# Altium PCB PCB.PcbDoc (part 1 of 3)
Units mm, origin at the board's own origin, x right, y up, seen from the top; angles counter-clockwise.
Board outline 152.4 x 101.6 mm, 2 copper layers (Top Layer, Bottom Layer); 124 components, 87 nets, 375 pads, 305 vias.
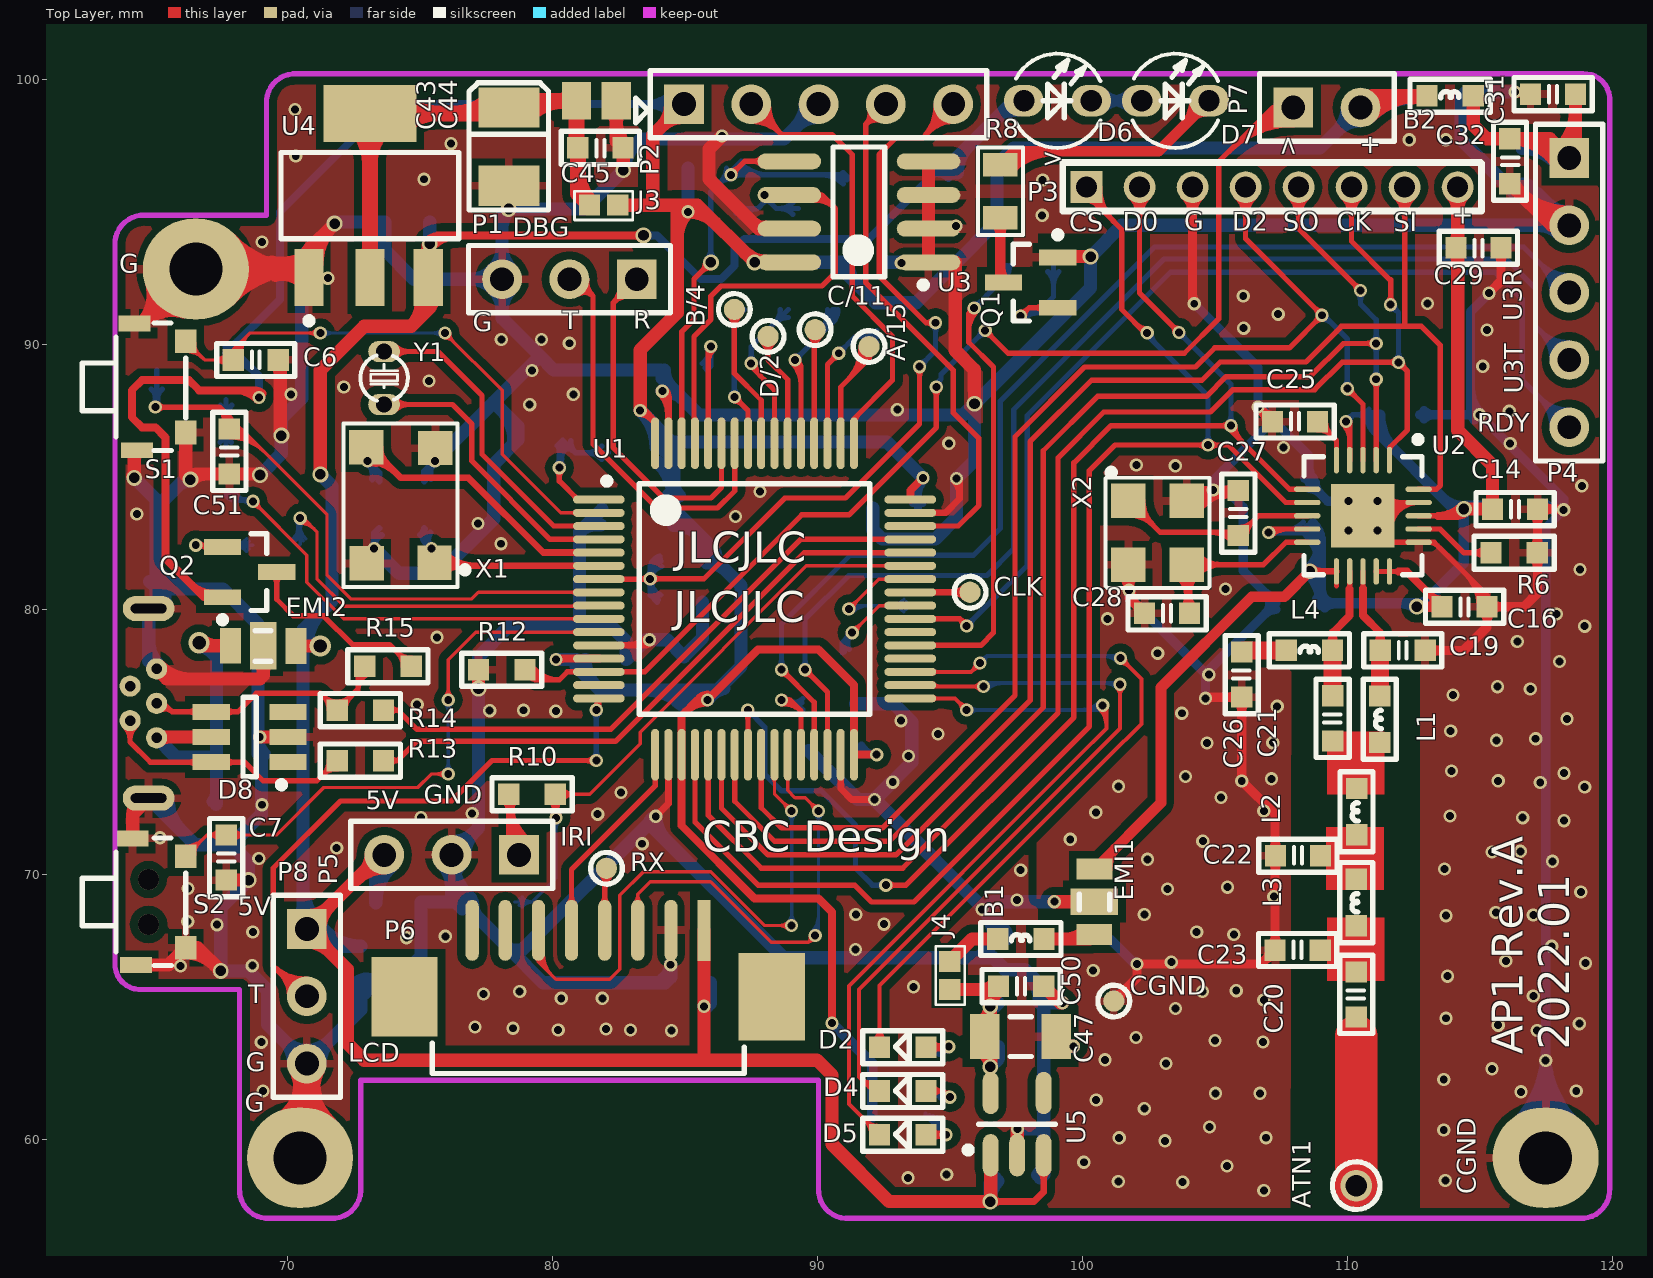
[diagram p0: Top Layer view]
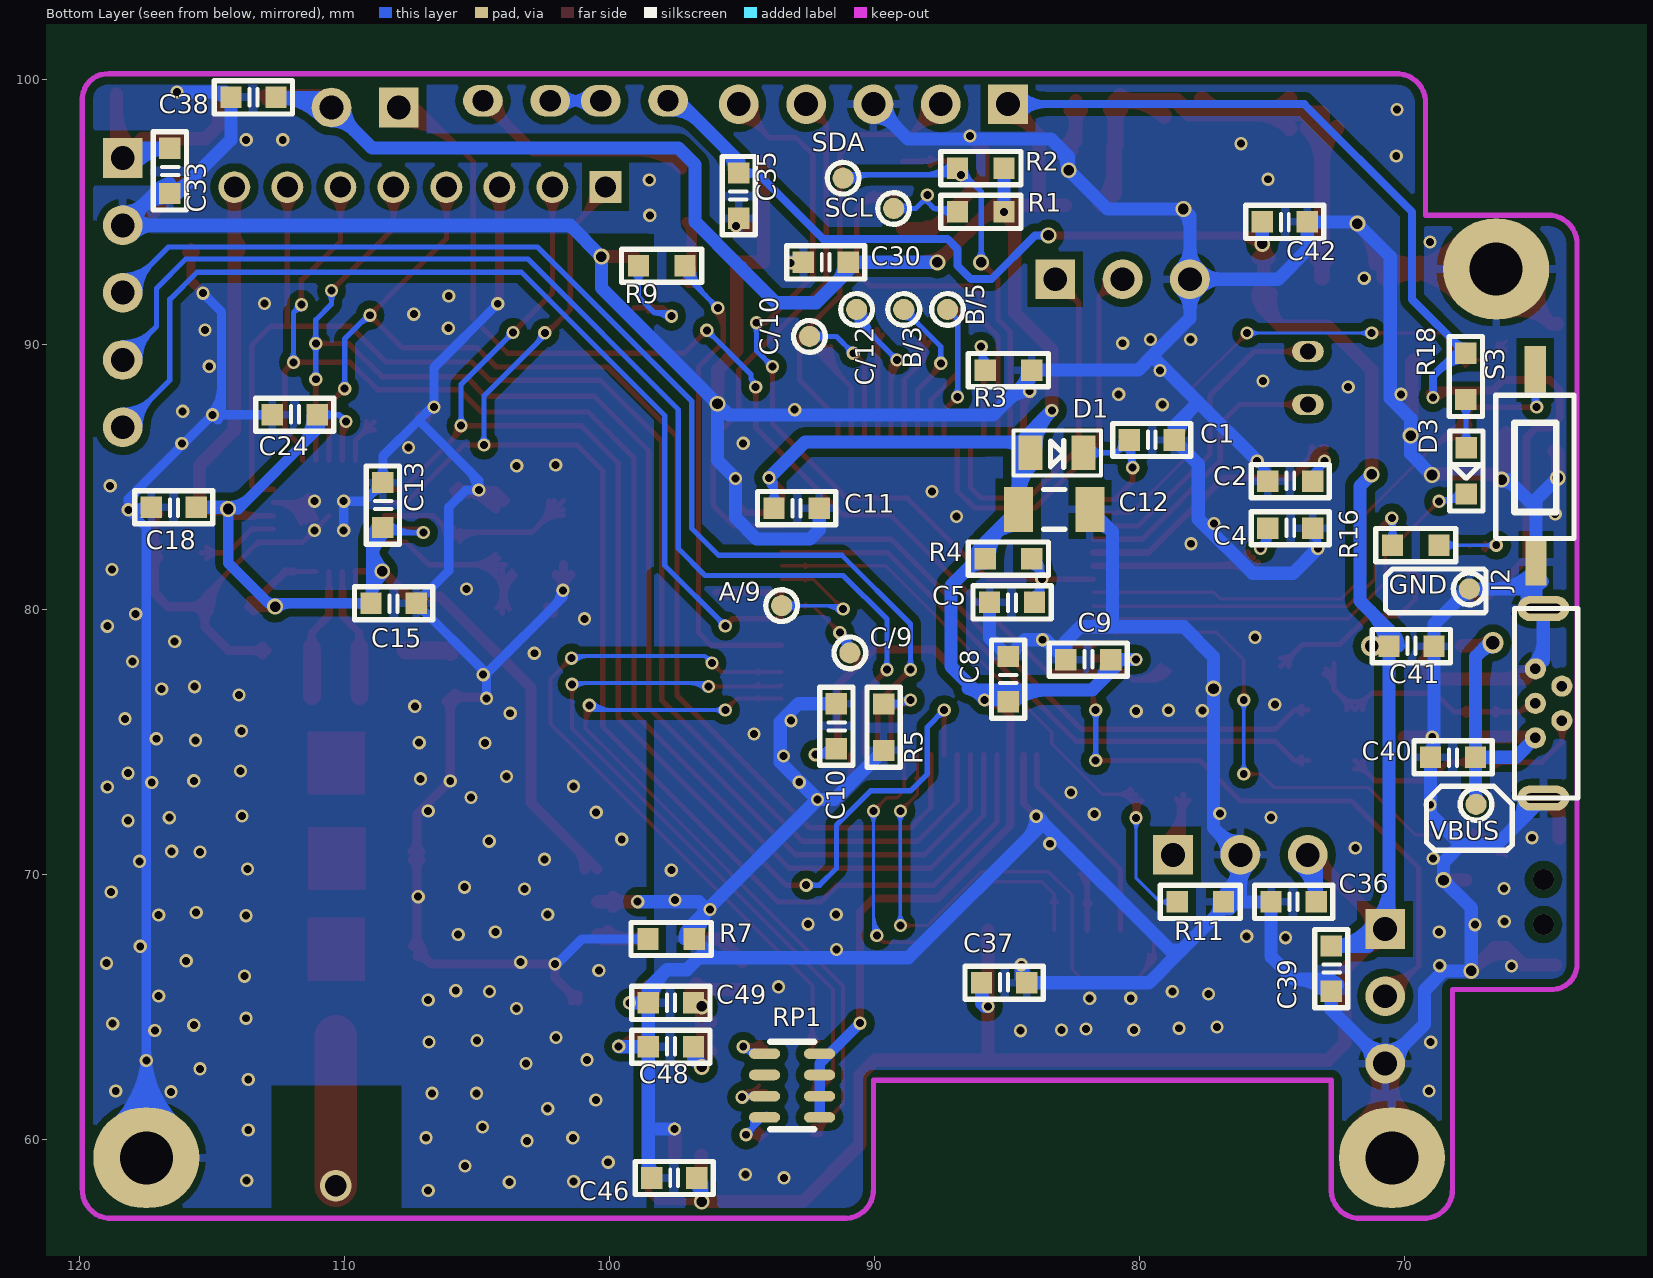
[diagram p1: Bottom Layer view, seen from below]

## Layer stack, top to bottom
Top Solder: solder mask 0.0102, Solder Resist, Dk 3.5
Top Layer: signal copper 0.0356
Dielectric 1: dielectric 0.32, FR-4, Dk 4.8
Bottom Layer: signal copper 0.0356
Bottom Solder: solder mask 0.0102, Solder Resist, Dk 3.5

## Board outline
25.4,25.4 177.8,25.4 177.8,127 25.4,127

## Design rules (kind name [scope] priority, off if disabled: settings)
Clearance Clearance_1 [IsRegion] p1: gap=0.3
Clearance [All] p2: gap=0.15
ComponentClearance [All] p1: gap=0.127 collisioncheckmode=3 verticalgap=0.254 showdistances=FALSE
DiffPairsRouting [All] p1: maxlimit=2 minlimit=0.2 mostfreqgap=0.254 toplayer_minwidth=0.2 toplayer_maxwidth=2 toplayer_prefwidth=0.381 bottomlayer_minwidth=0.2 bottomlayer_maxwidth=2 bottomlayer_prefwidth=0.381 maxuncoupledlength=12.7
HoleSize [All] p1: absolutevalues=TRUE maxlimit=6.3 minlimit=0.2 maxpercent=80.000 minpercent=20.000
HoleToHoleClearance [All] p1: gap=0.15 allowstackedmicrovias=TRUE
MinimumSolderMaskSliver [All] p1: minsoldermaskwidth=0.15
PlaneClearance [All] p1: clearance=0.4
PlaneConnect [All] p1: planeconnectstyle=Relief reliefexpansion=0.508 reliefentries=4 reliefconductorwidth=0.4 reliefairgap=0.254
PolygonConnect PolygonConnect_1 [IsVia] p1: connectstyle=Direct reliefconductorwidth=0.254 reliefentries=4 polygonreliefangle="90 Angle" airgapwidth=0.254
PolygonConnect [All] p2: connectstyle=Relief reliefconductorwidth=0.3 reliefentries=4 polygonreliefangle="90 Angle" airgapwidth=0.254
RoutingVias [All] p1: holewidth=0.3 width=0.5 viastyle="Through Hole" minholewidth=0.3 minwidth=0.5 maxholewidth=1 maxwidth=2
SilkToSilkClearance [All] p1: silktosilkclearance=0.089
SilkToSolderMaskClearance [IsPad] p1: minsilkscreentomaskgap=0.127 clearancetoexposedcopper=TRUE
SolderMaskExpansion [All] p1: expansion=0.102
Width [All] p1: maxlimit=5 minlimit=0.127 preferedwidth=0.2
20 further rules are at their usual default settings.

## Classes and differential pairs
component class Sheet4: C40 C41 C42 C43 C44 C45 C46 C47 C48 C49 C50 D8 EMI2 GND J2 J3 J4 Q2 R13 R14 R15 R16 U4 U5 VBUS
component class Sheet3: B2 C30 C31 C32 C33 C35 C36 C37 C38 C39 D6 D7 P4 P5 P6 P7 P8 Q1 R8 R9 R10 R11 R12 RX SCL SDA U3
component class Sheet2: ATN1 B1 C13 C14 C15 C16 C18 C19 C20 C21 C22 C23 C24 C25 C26 C27 C28 C29 CGND EMI1 L1 L2 L3 L4 P3 R6 R7 U2 X2
component class Sheet1: A/9 A/15 B/4 B/5 C1 C2 C4 C5 C6 C7 C8 C9 C10 C11 C12 C51 C/9 C/11 CLK D1 D2 D3 D4 D5 D/2 P1 P2 R1 R2 R3 R4 R5 R18 RP1 S1 S2 S3 TP3 TP5 TP7 U1 X1 Y1
differential pair USB_FS_D: +USB_FS_D_P -USB_FS_D_N
differential pair D: +D_P -D_N
differential pair RFO: +RFO_P -RFO_N

## Components (designator, comment, footprint, x,y, rotation, side; value= is the part's Value field where it differs from the comment)
A/9 "TestPoint" TP_0.8 93.505,80.141 r90 bottom (schematic designator TP10)
A/15 "TestPoint" TP_0.8 91.948,89.916 r90 top (schematic designator TP8)
ATN1 "TestPoint" TP 110.327,58.257 r90 top
B1 "680R" L0603 98.552,67.564 r180 top
B2 "680R" L0603 114.746,99.374 r180 top
B/3 "TestPoint" TP_0.8 88.9,91.313 r90 bottom (schematic designator TP3)
B/4 "TestPoint" TP_0.8 86.868,91.313 r90 top (schematic designator TP2)
B/5 "TestPoint" TP_0.8 87.249,91.313 r90 bottom (schematic designator TP1)
C1 "0.1uf" C0603 79.394,86.39 r180 bottom
C2 "10pf" C0603 74.168,84.836 r180 bottom
C4 "10pf" C0603 74.168,83.058 r180 bottom
C5 "0.1uf" C0603 84.963,80.264 r0 bottom
C6 "0.1uf" C0603 68.961,89.408 r0 top
C7 "0.1uf" C0603 67.691,70.485 r270 top
C8 "0.1uf" C0603 84.963,77.216 r270 bottom
C9 "0.1uf" C0603 81.788,78.105 r180 bottom
C10 "0.1uf" C0603 91.44,75.438 r270 bottom
C11 "0.1uf" C0603 93.091,83.82 r0 bottom
C12 "10uf" C1206 83.227,83.774 r0 bottom
C13 "0.01uf" C0603 108.549,83.784 r270 bottom
C14 "0.01uf" C0603 116.169,83.784 r180 top
C15 "220pf" C0603 108.295,80.228 r0 bottom
C16 "220pf" C0603 114.264,80.101 r180 top
C18 "220pF NP0" C0603 116.589,83.852 r0 bottom
C19 "3.9pF NP0" C0603 112.232,78.45 r0 top
C20 "220pF NP0" C0603 110.327,65.623 r90 top
C21 "3.9pF NP0" C0603 109.438,76.037 r90 top
C22 "8.2pF NP0" C0603 108.281,70.703 r0 top
C23 "5.6pF NP0" C0603 108.268,67.147 r0 top
C24 "0.1uf" C0603 111.724,87.34 r180 bottom
C25 "0.1uf" C0603 108.168,87.086 r0 top
C26 "220pF NP0" C0603 106.009,77.688 r90 top
C27 "12pF NP0" C0603 105.882,83.784 r90 top
C28 "15pF NP0" C0603 103.342,79.847 r0 top
C29 "0.1uf" C0603 114.788,93.64 r180 top
C30 "0.1uf" C0603 91.694,93.091 r180 bottom
C31 "0.1uf" C0603 117.602,99.441 r180 top
C32 "0.01uf" C0603 116.128,96.756 r270 top
C33 "1uf" C0603 116.586,96.393 r270 bottom
C35 "1uf" C0603 95.123,95.758 r90 bottom
C36 "0.1uf" C0603 74.041,68.961 r180 bottom
C37 "0.1uf" C0603 84.963,65.913 r180 bottom
C38 "0.1uf" C0603 113.284,99.314 r180 bottom
C39 "0.1uf" C0603 72.771,66.294 r270 bottom
C40 "0.1uf" C0603 68.326,74.422 r0 bottom
C41 "1uf" C0603 69.596,78.613 r180 bottom
C42 "0.1uf" C0603 74.676,94.615 r0 bottom
C43 "25V" C_B型 78.359,98.933 r270 top
C44 "4.7uf" C0805 81.661,99.187 r180 top
C45 "0.1uf" C0603 81.661,97.409 r180 top
C46 "0.1uf" C0603 97.409,58.547 r180 bottom
C47 "22uf" C1206 97.663,63.881 r180 top
C48 "4.7uf" C0603 97.536,63.5 r180 bottom
C49 "0.1uf" C0603 97.536,65.151 r180 bottom
C50 "220pf" C0603 97.536,65.786 r180 top
C51 "0.1uf" C0603 67.818,86.106 r90 top
C/9 "TestPoint" TP_0.8 90.932,78.359 r90 bottom (schematic designator TP9)
C/10 "TestPoint" TP_0.8 92.456,90.297 r90 bottom (schematic designator TP7)
C/11 "TestPoint" TP_0.8 89.916,90.551 r90 top (schematic designator TP6)
C/12 "TestPoint" TP_0.8 90.678,91.313 r90 bottom (schematic designator TP5)
CGND "TestPoint" TP_0.8 101.181,65.223 r90 top (schematic designator TP15)
CLK "TestPoint" TP_0.8 95.758,80.645 r90 top (schematic designator TP11)
D1 "1N4148" D0805 83.144,85.855 r180 bottom
D2 "红色LED" LED0603 93.218,63.5 r180 top
D3 "黄色LED" LED0603 67.691,85.217 r270 bottom
D4 "红色LED" LED0603 93.218,61.849 r180 top
D5 "红色LED" LED0603 93.218,60.198 r180 top
D6 "LED-R" LED_S 97.79,99.187 r0 top
D7 "LED-R" LED_S 102.235,99.187 r0 top
D8 "TVS" USBLC6-2 68.58,75.184 r180 top
D/2 "TestPoint" TP_0.8 88.138,90.297 r90 top (schematic designator TP4)
EMI1 "NFM21PC105B1C" NFM21PC 100.457,68.961 r270 top
EMI2 "NFM21PC105B1C" NFM21PC 69.088,78.613 r180 top
GND "TestPoint" TP_0.8 67.564,80.772 r90 bottom (schematic designator TP20)
J2 "USBmini" USB_MICRO_B 64.77,76.454 r90 bottom
J3 "JUMPER" Jsmall 81.407,95.25 r0 top
J4 "JUMPER" Jsmall 94.996,65.659 r90 top
L1 "27nH" L0603 111.216,76.73 r270 top
L2 "22nH" L0603 110.339,73.243 r270 top
L3 "27nH" L0603 110.327,69.814 r270 top
L4 "27nH" L0603 109.438,78.45 r180 top
P1 "DEBUG UART" HDR1X3 83.185,92.456 r180 top
P2 "Header 5" HDR1X5 84.963,99.06 r0 top
P3 "Header 8" CC1101 100.153,95.928 r90 top
P4 "CO2" HDR1X5 118.364,97.028 r270 top
P5 "Header 3" HDR1X3 78.74,70.739 r180 top
P6 "PM25" 1.25T-8P 85.725,67.691 r180 top
P7 "LIGHT" HDR1X2 107.95,98.933 r0 top
P8 "LCD" HDR1X3 70.739,67.945 r270 top
Q1 "NPN" SOT23_BJT 98.044,92.329 r180 top
Q2 "PNP" SOT23_BJT 68.58,81.407 r0 top
R1 "4K7" R0603 86.868,94.996 r180 bottom
R2 "4K7" R0603 86.868,96.647 r180 bottom
R3 "0R" R0603 84.074,89.027 r0 bottom
R4 "10K" R0603 84.074,81.915 r0 bottom
R5 "10K" R0603 89.662,74.676 r90 bottom
R6 "56K" R0603 115.407,82.133 r0 top
R7 "0R" R0603 98.552,67.564 r180 bottom
R8 "4R3" R0805 96.901,96.774 r90 top
R9 "100R" R0603 97.155,92.964 r0 bottom
R10 "1K" R0603 78.359,73.025 r0 top
R11 "DNE" R0603 76.835,68.961 r0 bottom
R12 "10K" R0603 77.216,77.724 r0 top
R13 "20R" R0603 71.882,74.295 r0 top
R14 "20R" R0603 71.882,76.2 r0 top
R15 "1K" R0603 74.676,77.851 r180 top
R16 "100R" R0603 68.707,82.423 r0 bottom
R18 "1K" R0603 67.691,89.662 r270 bottom
RP1 "1K" R_PACK4_SMD 92.075,60.833 r90 bottom
RX "TestPoint" TP_0.8 82.042,70.231 r90 top (schematic designator TP18)
S1 "SW-PB" SWPB_SMD_90D_48_18_15#1 64.77,88.392 r90 top
S2 "SW-PB" SWPB_SMD_90D_48_18_15#2 64.77,68.961 r90 top
S3 "SW-PB" SW2*1Small 63.246,85.217 r90 bottom
SCL "TestPoint" TP_0.8 89.281,95.123 r90 bottom (schematic designator TP16)
SDA "TestPoint" TP_0.8 91.186,96.266 r90 bottom (schematic designator TP17)
U1 "STM32F103RB" STM32F103RB 87.63,80.391 r0 top
U2 "CC1101" QFN50P400X400X80_HS-21N 110.581,83.53 r270 top
U3 "AT24C512" AT24C02 91.567,94.996 r180 top
U4 "AMS1117-3.3V" SOT223 72.517,96.012 r0 top
U5 "ADP151" ADP151 97.536,60.579 r90 top
VBUS "TestPoint" TP_0.8 67.31,72.644 r90 bottom (schematic designator TP19)
X1 "XTAL-8Mhz" XTAL5032 74.295,83.947 r90 top
X2 "XTAL4" XTAL3225 102.834,82.895 r270 top
Y1 "XTAL-32K768Hz" CRY_S 73.152,89.027 r90 top

## Footprints (in the part's own frame and the unit in brackets; to place one, negate y for a bottom-side part, rotate by r counter-clockwise, add the part's x,y. Pads: shape width x height; smd on the part's side, far side on the other; paste and mask are expansions set on the pad)
1.25T-8P [mm]
  rect 0.5x2.3 smd: 1(0,-0.2)
  oval 0.5x2.3 smd: 2(1.25,-0.2) 3(2.5,-0.2) 4(3.75,-0.2) 5(5,-0.2) 6(6.25,-0.2) 7(7.5,-0.2) 8(8.75,-0.2)
  rect 2.5x3.3 smd: ""(-2.55,2.3)
  rect 2.5x3 smd: ""(11.3,2.3)
  silkscreen extent -1.51,4.06 10.26,5.2
ADP151 [mm]
  oval 1.6x0.6 smd: 1(-1.175,1) 2(-1.175,0) 3(-1.175,-1) 4(1.175,-1) 5(1.175,1)
  silkscreen extent -1.1,-1.45 0,1.97, body extent -0.8,-1.45 0.8,1.45, height 1
AT24C02 [mm] "SOIC, 8-Leads, Body 4.9x3.9mm (max), Pitch 1.27mm, IPC Medium Density"
  oval 2.4x0.6 smd: 1(-2.625,1.905) 2(-2.625,0.635) 3(-2.625,-0.635) 4(-2.625,-1.905) 5(2.625,-1.905) 6(2.625,-0.635) 7(2.625,0.635) 8(2.625,1.905)
  silkscreen extent -2.55,-2.45 0.98,2.88, body extent -1.95,-2.45 1.95,2.45, height 2.65
C0603 [mm]
  rect 0.8x0.813 smd: 1(-1,0) 2(0.7,0)
  silkscreen extent -1.63,-0.63 1.32,0.63
C0805 [mm] "Chip Capacitor, Body 2.0x1.3mm, IPC High Density"
  rect 1.1x1.4 smd: 1(-0.75,0) 2(0.75,0)
  body extent -1.1,-0.72 1.1,0.72, height 1.4
C1206 [mm] "Chip Capacitor, Body 3.2x1.6mm, IPC High Density"
  rect 1.1x1.7 smd: 1(-1.35,0) 2(1.35,0)
  silkscreen extent -0.4,-0.75 0.4,0.75, body extent -1.7,-0.9 1.7,0.9, height 1.3
C_B型 [mm]
  rect 1.524x2.3 smd: 1(0,0) 2(2.95,0)
  silkscreen extent -0.93,-1.5 3.87,1.5
CC1101 [mm]
  rect 1.2x1.2 hole 0.8: 1(0,0)
  round 1.2 hole 0.8: 2(0,-2) 3(0,-4) 4(0,-6) 5(0,-8) 6(0,-10) 7(0,-12) 8(0,-14)
  silkscreen extent -0.9,-14.9 0.93,0.9
CRY_S [mm]
  oval 0.8x1.2 hole 0.6: 1(-1.3,-0.5) 2(0.7,-0.5)
  silkscreen extent -1.16,-1.4 0.56,0.4
D0805 [mm]
  rect 0.9x1.3 smd: 1(-0.97,0.05) 2(1.03,0.05)
  silkscreen extent -1.62,-0.8 1.68,0.9
HDR1X2 [mm] "Connector; Header; 2 Position"
  rect 1.5x1.5 hole 0.9: 1(0,0)
  round 1.5 hole 0.9: 2(2.54,0)
  silkscreen extent -1.27,-1.27 3.81,1.27
HDR1X3 [mm] "Connector; Header; 3 Position"
  rect 1.5x1.5 hole 0.9: 1(0,0)
  round 1.5 hole 0.9: 2(2.54,0) 3(5.08,0)
  silkscreen extent -1.27,-1.27 6.35,1.27
HDR1X5 [mm] "Connector; Header; 5 Position"
  rect 1.5x1.5 hole 0.9: 1(0,0)
  round 1.5 hole 0.9: 2(2.54,0) 3(5.08,0) 4(7.62,0) 5(10.16,0)
  silkscreen extent -1.27,-1.27 11.43,1.27
Jsmall [mm]
  rect 0.8x0.8 smd: 1(0,0) 2(1.06,0)
  silkscreen extent -0.57,-0.56 1.63,0.53
L0603 [mm]
  rect 0.8x0.813 smd: 1(0,0) 2(1.75,0)
  silkscreen extent -0.64,-0.63 2.39,0.63
LED0603 [mm]
  rect 0.8x0.813 smd: 1(-0.88,0.02) 2(0.87,0.02)
  silkscreen extent -1.51,-0.61 1.51,0.64
LED_S [mm]
  oval 1.5x1.2 hole 0.8: 1(0,0) 2(2.54,0)
  silkscreen extent -0.34,-1.78 2.88,1.78
NFM21PC [mm] "Chip Inductor, 2-Leads, Body 2.0x1.3mm, IPC Medium Density"
  rect 0.8x1.35 smd: 1(-1.24,0) 3(1.23,-0.01)
  rect 1x1.8 smd: 2(-0.01,-0.01)
  silkscreen extent -0.3,-0.58 0.3,0.58, body extent -1,-0.63 1,0.63, height 0.85
QFN50P400X400X80_HS-21N [mm] "QFN, 20-Leads, Body 4.00x4.00mm, Pitch 0.50mm, Thermal Pad 2.40x2.40mm, IPC Medium Density"
  oval 1x0.2 smd: 1(-2.1,1) 2(-2.1,0.5) 3(-2.1,0) 4(-2.1,-0.5) 5(-2.1,-1) 11(2.1,-1) 12(2.1,-0.5) 13(2.1,0) 14(2.1,0.5) 15(2.1,1)
  oval 0.2x1 smd: 6(-1,-2.1) 7(-0.5,-2.1) 8(0,-2.1) 9(0.5,-2.1) 10(1,-2.1) 16(1,2.1) 17(0.5,2.1) 18(0,2.1) 19(-0.5,2.1) 20(-1,2.1)
  rect 2.4x2.4 smd: 21(0,0)
  silkscreen extent -3,-2.23 2.23,2.22, body extent -2.07,-2.08 2.08,2.07, height 0.8
R0603 [mm]
  rect 0.8x0.813 smd: 1(0,0) 2(1.75,0)
  silkscreen extent -0.64,-0.63 2.39,0.63
R0805 [mm]
  rect 0.9x1.3 smd: 1(-2,0) 2(0,0)
  silkscreen extent -2.65,-0.85 0.65,0.85
R_PACK4_SMD [mm]
  oval 0.4x1.174 smd: 1(0,0) 2(0,2.074) 3(0.8,0) 4(0.8,2.074) 5(1.6,0) 6(1.6,2.074) 7(2.4,0) 8(2.4,2.074)
  silkscreen extent -0.45,0.21 2.85,1.86
SOT23_BJT [mm]
  rect 1.4x0.6 smd: 1(-1.025,-0.95) 2(-1.025,0.95) 3(1.025,0)
  silkscreen extent -1.15,-1.92 0.65,1.45, body extent -0.65,-1.46 0.65,1.47, height 1.45
SOT223 [mm]
  rect 1.1x2.15 smd: 1(-1.7,-3.5) 2(0.6,-3.5) 3(2.8,-3.5)
  rect 3.5x2.15 smd: 2(0.6,2.7)
  silkscreen extent -2.75,-5.25 3.95,1.22
STM32F103RB [mm] "SQFP, 64-Leads, Body 12.0x12.0mm (max), Pitch 0.50mm, IPC Medium Density"
  oval 1.95x0.3 smd: 1(-5.875,3.75) 2(-5.875,3.25) 3(-5.875,2.75) 4(-5.875,2.25) 5(-5.875,1.75) 6(-5.875,1.25) 7(-5.875,0.75) 8(-5.875,0.25) 9(-5.875,-0.25) 10(-5.875,-0.75) 11(-5.875,-1.25) 12(-5.875,-1.75) 13(-5.875,-2.25) 14(-5.875,-2.75) 15(-5.875,-3.25) 16(-5.875,-3.75) 33(5.875,-3.75) 34(5.875,-3.25) 35(5.875,-2.75) 36(5.875,-2.25) 37(5.875,-1.75) 38(5.875,-1.25) 39(5.875,-0.75) 40(5.875,-0.25) 41(5.875,0.25) 42(5.875,0.75) 43(5.875,1.25) 44(5.875,1.75) 45(5.875,2.25) 46(5.875,2.75) 47(5.875,3.25) 48(5.875,3.75)
  oval 0.3x1.95 smd: 17(-3.75,-5.875) 18(-3.25,-5.875) 19(-2.75,-5.875) 20(-2.25,-5.875) 21(-1.75,-5.875) 22(-1.25,-5.875) 23(-0.75,-5.875) 24(-0.25,-5.875) 25(0.25,-5.875) 26(0.75,-5.875) 27(1.25,-5.875) 28(1.75,-5.875) 29(2.25,-5.875) 30(2.75,-5.875) 31(3.25,-5.875) 32(3.75,-5.875) 49(3.75,5.875) 50(3.25,5.875) 51(2.75,5.875) 52(2.25,5.875) 53(1.75,5.875) 54(1.25,5.875) 55(0.75,5.875) 56(0.25,5.875) 57(-0.25,5.875) 58(-0.75,5.875) 59(-1.25,5.875) 60(-1.75,5.875) 61(-2.25,5.875) 62(-2.75,5.875) 63(-3.25,5.875) 64(-3.75,5.875)
  silkscreen extent -5.7,-4.35 4.35,4.57, body extent -5,-5 5,5, height 2.45
SW2*1Small [mm]
  rect 1.8x0.8 smd: 1(-3.42,1.802) 2(3.81,1.83)
  silkscreen extent -2.54,0.37 2.86,3.32
SWPB_SMD_90D_48_18_15#1 [mm]
  rect 0.9x0.8 smd: 1(-1.725,-1.4) 2(1.725,-1.4)
  rect 0.6x1.2 smd: ""(-2.388,0.441) ""(2.387,0.53)
  silkscreen extent -2.4,-1.4 2.41,2.5
SWPB_SMD_90D_48_18_15#2 [mm]
  rect 0.9x0.8 smd: 1(-1.725,-1.4) 2(1.725,-1.4)
  rect 0.6x1.2 smd: ""(-2.375,0.48) ""(2.4,0.6)
  silkscreen extent -2.4,-1.4 2.41,2.5
TP [mm] "测试点"
  round 1.2 hole 0.8: 1(0,0)
  silkscreen extent -0.9,-0.9 0.9,0.9
TP_0.8 [mm]
  round 0.8 smd paste+0: 1(0,0)
  silkscreen extent -0.6,-0.6 0.6,0.6
USB_MICRO_B [mm]
  round 0.8 hole 0.4: 1(-1.3,0.3) 2(-0.65,-0.7) 3(0,0.3) 4(0.65,-0.7) 5(1.3,0.3)
  oval 0.95x1.95 hole 0.35 slot 1.35 at 90 deg: 5(-3.575,0) 5(3.575,0)
  silkscreen extent -3.57,-1.3 3.58,1.09
USBLC6-2 [mm] "SOT23, 6-Leads, Body 3.0x3.0mm (max), Pitch 0.95mm, IPC Medium Density"
  rect 1.4x0.6 smd: 1(-1.45,0.95) 2(-1.45,0) 3(-1.45,-0.95) 4(1.45,-0.95) 5(1.45,0) 6(1.45,0.95)
  silkscreen extent -1.33,-1.5 0.25,1.92, body extent -0.87,-1.52 0.87,1.53, height 1.45
XTAL3225 [mm]
  rect 1.3x1.3 smd: 1(-1.21,-1.1) 2(1.21,-1.1) 3(1.21,1.1) 4(-1.21,1.1)
  silkscreen extent -2.4,-1.96 2.09,1.96, body extent -1.71,-1.25 1.6,1.36, height 0.7
XTAL5032 [mm]
  rect 1.3x1.3 smd: 1(-2.19,-1.26) 2(2.14,-1.28) 3(2.17,1.32) 4(-2.21,1.3)
  silkscreen extent -3.11,-2.54 3.07,2.17, body extent -2.5,-1.59 2.49,1.6, height 0.7

## Part data
A/9 A/15 ATN1 B/3 B/4 B/5 C/9 C/10 C/11 C/12 CGND CLK D/2 GND RX SCL SDA VBUS: "一个测试点"
B1 B2 L2: library part L
C1 C2 C4 C5 C6 C7 C8 C9 C10 C11 C12 C13 C14 C15 C16 C18 C19 C20 C21 C22 C23 C24 C25 C26 C27 C28 C29 C30 C31 C32 C33 C35 C36 C37 C38 C39 C40 C41 C42 C44 C45 C46 C47 C48 C49 C50 C51: library part Cap, "Capacitor"
C43: library part Cap+, "Polarized Capacitor (Radial)"
D1: library part DIODE, "Diode"
D2 D3 D4 D5 D6 D7: library part LED, "Typical INFRARED GaAs LED"
D8: library part USBLC6-2
J2: library part USB_mini
J3 J4: library part J
L1 L3 L4: library part L, "LQG15HS27NJ02D"
P1 P8: library part "Header 3", "Header, 3-Pin"
P2: "Header, 5-Pin"
P3: "Header, 8-Pin"
P4: library part "Header 5", "Header, 5-Pin"
P5: "Header, 3-Pin"
P6: library part "Header 8", "Header, 8-Pin"
P7: library part "Header 2", "Header, 2-Pin"
Q1: "NPN Bipolar Transistor"
Q2: "PNP Bipolar Transistor"
R1 R2 R3 R4 R5 R6 R7 R8 R9 R10 R11 R12 R13 R14 R15 R16 R18: library part Res
RP1: library part RESPACK4
S1 S2 S3: "Switch"
U3: "2-wire Serial  EEPROM  512K (65,536 x 8)"
U4: library part 1117
X1: library part XTALSMT
Y1: library part XTAL, "Crystal Oscillator 32K"

## Free pads (board coordinates)
  oval 4x3.8 hole 2: 0(66.548,92.837) 1(70.485,59.309) 2(117.475,59.309)

## Via types
v1: diameter 0.5, hole 0.3, Top Layer to Bottom Layer, 278 vias
v2: diameter 0.6, hole 0.4, Top Layer to Bottom Layer, 23 vias
v3: diameter 0.8, hole 0.5, Top Layer to Bottom Layer, 2 vias
v4: diameter 0.8, hole 0.8, Top Layer to Bottom Layer, 2 vias

## Nets (pads, with @x,y where several pads share a name; then routed paths per layer and width w, separated by ;. In a path a pad name is that pad's centre, name@x,y a point inside that pad or via, vN(x,y) a via of type N, cw(c..) or ccw(c..) an arc to the next point about the centre after c; other vN are vias at no path point)
3V3: B2.2 C8.2 C9.2 C10.2 C11.2 C12.2 C30.2 C38.2 D1.1 J3.2 P2.1 P7.2 Q2.1 R1.2 R2.2 R4.2 R18.1 RP1.1 RP1.3 RP1.5 RP1.7 U1.13 U1.19 U1.32 U1.48 U1.64 U3.8 | length 207.3
  Top Layer w0.3: 66.4,80.92 ccw(c67.155,81.674) Q2.1@67.155,80.607 ; Q2.1@67.555,80.457 66.863,80.457 65.405,81.915 65.405,86.487 65.024,86.868 64.516,86.868 64.135,87.249 64.135,88.265 64.516,88.646 66.294,88.646 66.675,88.265 68.662,88.265 v1(68.933,87.994) ; 68.037,88.265 cw(c68.037,87.097) v1@68.863,87.923 ; 68.761,88.265 cw(c68.761,87.821) v1@69.075,88.135 ; v1(80.137,78.105) 80.173,78.141 U1.13@81.755,78.141 ; v1@80.208,78.034 cw(c80.465,77.777) 80.465,78.141 ; v1@83.312,87.403 cw(c83.312,86.855) 83.7,87.242 ; v1(83.312,87.503) 83.439,87.503 83.88,87.062 U1.64@83.88,86.266 ; 85.031,76.141 cw(c85.852,75.32) v1@85.852,76.481 ; 85.543,76.653 cw(c85.852,76.344) v1@85.852,76.781 ; v1(90.551,64.389) 90.551,68.58 90.043,69.088 87.63,69.088 84.88,71.838 U1.19@84.88,74.516 84.88,75.99 85.471,76.581 v1(85.852,76.581) 87.757,78.486 90.043,78.486 91.38,77.149 U1.32@91.38,74.516 v1(92.235,74.516) ; U1.48@93.505,84.141 93.505,84.488 v1(93.98,84.963)
  Top Layer w0.5: J3.2@82.804,95.25 83.79,95.25 ; v1(83.312,87.503) 83.312,89.789 84.709,91.186 84.709,95.25 ; P2.1@84.463,99.06 cw(c83.256,99.06) 84.109,98.206 cw(c84.963,97.353) P2.1@84.963,98.56 ; 84.505,95.25 cw(c84.505,94.383) v1(85.118,94.996) ; 84.709,94.009 cw(c86.105,94.009) v1(85.118,94.996) ; P2.1@84.963,99.06 83.79,97.887 83.79,95.25 ; 86.154,94.567 ccw(c85.118,93.531) v1(85.118,94.996) ; 87.253,93.468 ccw(c88.042,94.256) U3.8@88.042,93.141 ; 87.378,93.384 cw(c87.114,92.988) v2@87.581,93.081 ; v2(87.63,93.091) 85.471,95.25 ; P7.2@110.844,98.579 cw(c112.762,96.661) B2.2@112.762,99.374 ; 111.554,99.374 ccw(c111.554,97.869) P7.2@110.49,98.933 110.931,99.374 B2.2@112.996,99.374 ; 112.473,99.297 cw(c112.626,98.726) B2.2@112.921,99.238 ; 83.79,95.25 84.709,95.25 ; 84.709,95.25 cw(c84.709,94.794) v1(85.118,94.996) ; 84.709,95.25 cw(c84.709,94.794) v1(85.118,94.996) ; 84.709,95.25 85.471,95.25 ; v1(85.118,94.996) cw(c85.471,94.878) 85.471,95.25
  Bottom Layer w0.3: R18.1@67.697,89.412 cw(c67.697,87.904) 68.764,88.97 ; R18.1@67.697,89.712 cw(c67.697,88.929) 68.251,89.483 ; R18.1@67.697,89.912 ccw(c67.697,90.5) 68.113,90.084 ; R18.1@67.947,89.662 cw(c68.567,89.662) 68.129,90.1 ; v1(68.933,87.994) 68.933,88.801 68.072,89.662 R18.1@67.691,89.662 69.723,91.694 69.723,94.996 73.787,99.06 P2.1@84.963,99.06 ; C9.2@80.899,78.105 C9.2@81.088,78.105 ; P2.1@84.539,98.636 ccw(c83.514,97.611) 83.514,99.06 ccw(c83.514,100.509) P2.1@84.539,99.484 ; C10.2@91.44,74.738 91.662,74.516 v1(92.235,74.516) cw(c92.235,75.161) C10.2@91.667,74.856 ; C11.2@93.614,84.003 ccw(c93.187,84.43) 93.791,84.43 ccw(c94.395,84.43) C11.2@93.968,84.003 ; C11.2@93.791,83.82 93.791,84.774 v1(93.98,84.963) ; 93.791,84.265 cw(c94.678,84.265) v1@94.051,84.892 ; 94.968,92.964 95.123,92.964
  Bottom Layer w0.4: v1(85.852,76.581) 86.233,76.962 ; v1(90.551,64.389) 92.075,62.865 RP1.5@92.075,62.433 RP1.3@92.075,61.633 RP1.1@92.075,60.833
  Bottom Layer w0.5: v1(80.137,78.105) 80.899,78.105 80.899,77.851 81.788,76.962 86.233,76.962 ; C9.2@81.238,78.099 ccw(c82.654,78.099) 81.653,77.097 ; v1(83.312,87.503) D1.1@84.502,86.313 ; v1@83.35,87.465 cw(c81.99,86.105) D1.1@83.914,86.105 ; 83.518,76.962 cw(c83.518,75.077) C8.2@84.85,76.41 ; D1.1@83.972,85.563 cw(c82.512,84.104) C12.2@84.577,84.104 ; 84.204,86.611 cw(c83.697,86.105) D1.1@84.414,86.105 ; D1.1@84.255,85.963 cw(c85.099,85.119) 85.099,86.313 ; D1.1@84.326,85.917 cw(c83.719,85.311) 84.577,85.311 ; C12.2@84.365,84.286 ccw(c83.853,84.798) 84.577,84.798 ccw(c85.301,84.798) C12.2@84.789,84.286 ; C12.2@84.577,83.174 cw(c84.577,81.725) 85.601,82.75 ; C8.2@84.699,76.739 cw(c85.173,76.348) 85.173,76.962 ; 84.725,76.962 cw(c84.725,76.284) C8.2@85.204,76.763 ; 84.932,76.962 cw(c84.932,75.661) v1(85.852,76.581) ; C8.2@85.085,76.421 cw(c86.233,75.475) 86.233,76.962 ; v1(85.118,94.996) R2.2@85.118,96.647 ; 85.14,83.211 cw(c83.851,81.922) R4.2@85.674,81.922 ; C8.2@85.157,76.476 cw(c85.6,75.9) v1(85.852,76.581) ; R4.2@85.824,81.759 cw(c85.824,80.7) 86.573,81.448 ; 85.852,86.313 D1.1@84.502,86.313 ; 85.854,86.313 92.63,86.313 v1(93.98,84.963) ; 85.994,82.357 cw(c85.558,81.921) R4.2@86.174,81.921 ; 86.476,77.015 ccw(c86.688,76.045) v1(85.852,76.581) ; v2(87.63,93.091) C30.2@90.994,93.091 ; C30.2@90.994,92.775 92.202,91.567 93.726,91.567 95.123,92.964 96.774,94.615 96.774,96.774 97.409,97.409 108.966,97.409 P7.2@110.49,98.933 ; C30.2@91.144,93.085 ccw(c92.253,93.085) 91.469,92.3 ; P7.2@109.99,98.933 cw(c108.783,98.933) 109.636,98.079 cw(c110.49,97.226) P7.2@110.49,98.433 ; P7.2@110.847,98.583 cw(c112.584,96.885) C38.2@112.584,99.314 110.871,99.314 P7.2@110.49,98.933 ; 111.396,99.314 ccw(c111.396,98.047) P7.2@110.49,98.933 ; D1.1@84.502,86.313 84.577,86.238 C12.2@84.577,83.774 85.824,82.527 R4.2@85.824,81.915 86.106,81.915 87.122,80.899 87.122,77.851 86.233,76.962
3V3_RF: B1.2 J4.2 | length 2.2
  Top Layer w0.5: J4.2@94.996,66.719 95.841,67.564 B1.2@96.802,67.564
3V3_RFF: C13.2 C14.2 C15.2 C16.2 C18.1 C24.2 C29.2 EMI1.1 P3.8 U2.4 U2.9 U2.11 U2.14 U2.15 U2.18 | length 85.6
  Top Layer w0.2: v1(107.025,82.895) 107.152,82.895 v1@107.224,82.967 ; v1@107.131,82.789 cw(c107.713,82.207) 107.713,83.03 ; v1@107.16,83.03 U2.9@108.481,83.03 ; U2.11@109.574,81.43 U2.11@109.581,81.43 109.581,80.879 ; v1@109.84,86.98 cw(c109.258,86.398) 110.081,86.398 ; U2.4@110.081,85.63 v1@110.081,87.078 ; U2.14@111.081,81.43 U2.15@111.581,81.43 111.919,81.43 ; U2.18@112.681,83.53 113.409,83.53
  Top Layer w0.254: v2(108.576,81.438) 109.566,81.438 U2.11@109.574,81.43 ; v2@108.698,81.316 cw(c108.994,81.02) 108.994,81.438 cw(c108.994,81.856) v2@108.698,81.56
  Top Layer w0.3: 111.919,81.43 112.235,81.43 C16.2@113.564,80.101 ; 113.127,80.539 ccw(c113.564,80.977) C16.2@113.564,80.358 ; 113.142,80.523 cw(c112.727,80.108) C16.2@113.314,80.108 ; 113.409,83.53 114.137,83.53 ; 113.416,83.53 ccw(c113.416,84.759) v2@114.285,83.89 ; 114.14,83.53 ccw(c114.14,84.035) v2@114.497,83.678 ; v2@114.241,83.783 cw(c113.886,83.781) 114.137,83.53 ; v2@114.391,83.634 ccw(c114.388,83.279) 114.137,83.53 ; v2(114.391,83.784) 114.137,83.53
  Top Layer w0.4: EMI1.1@100.457,70.201 102.961,72.705 102.961,77.053 106.39,80.482 107.62,80.482 v2(108.576,81.438) ; EMI1.1@100.932,70.201 cw(c102.079,70.201) 101.268,71.012 ; v2(112.613,80.101) C16.2@113.564,80.101 ; C16.2@113.423,79.96 ccw(c113.082,79.618) 113.082,80.101 ccw(c113.082,80.584) C16.2@113.423,80.242
  Top Layer w0.5: P3.8@113.906,95.681 cw(c113.308,95.083) 114.153,95.083 cw(c114.998,95.083) P3.8@114.401,95.681 ; C29.2@113.982,93.528 cw(c113.568,93.114) 114.153,93.114 ; C29.2@113.982,93.753 ccw(c113.568,94.167) 114.153,94.167 ; P3.8@114.153,95.928 114.153,86.751 115.469,85.435 C14.2@115.469,83.784 v2(114.391,83.784)
  Bottom Layer w0.2: v1(107.025,82.895) 108.36,82.895 C13.2@108.549,83.084 ; v1@107.131,82.789 cw(c107.388,82.533) 107.388,82.895 cw(c107.388,83.257) v1@107.131,83.001 ; 107.362,82.895 ccw(c107.362,84.265) C13.2@108.331,83.296 ; 107.845,82.895 ccw(c107.845,83.782) C13.2@108.472,83.155 ; v1(109.946,87.086) 110.2,87.34 ; v1@109.947,87.236 ccw(c109.949,87.591) 110.2,87.34 ; v1@110.096,87.087 cw(c110.451,87.089) 110.2,87.34 ; C24.2@110.812,87.128 ccw(c110.3,86.616) 110.3,87.34 ccw(c110.3,88.064) C24.2@110.812,87.552 ; C24.2@111.024,87.34 110.2,87.34
  Bottom Layer w0.4: C13.2@108.414,82.943 cw(c107.012,81.54) 108.995,81.54 ; v2@108.505,81.367 cw(c107.322,80.184) C15.2@108.995,80.184 ; v2@108.507,81.511 ccw(c107.45,82.638) 108.995,82.638 ; C13.2@108.549,83.084 108.995,82.638 ; C13.2@108.556,82.884 cw(c108.556,82.417) C13.2@108.886,82.747 ; C13.2@108.697,83.225 cw(c107.978,82.506) 108.995,82.506 ; C13.2@108.756,83.084 ccw(c109.254,83.084) C13.2@108.902,82.731 ; 108.781,81.219 ccw(c108.317,81.714) 108.995,81.714 ; v2@108.788,81.65 cw(c108.287,81.149) 108.995,81.149 ; C15.2@108.854,80.376 ccw(c108.513,80.717) 108.995,80.717 ccw(c109.478,80.717) C15.2@109.137,80.376 ; C15.2@109.137,80.087 cw(c109.478,79.745) 109.478,80.228 cw(c109.478,80.711) C15.2@109.137,80.369 ; C24.2@110.824,87.334 ccw(c111.702,87.334) 111.081,86.713 ; C24.2@110.883,87.192 cw(c110.542,86.851) 111.024,86.851 cw(c111.507,86.851) C24.2@111.166,87.192 ; C24.2@111.024,87.34 111.024,86.77 114.01,83.784 v2(114.391,83.784) 114.391,81.752 112.867,80.228 C15.2@108.995,80.228 108.995,82.638 ; C24.2@111.224,87.334 ccw(c113.068,87.334) 111.764,86.03 ; 112.065,80.228 cw(c112.065,79.553) v2@112.543,80.03 ; v2@112.613,80.201 ccw(c112.613,80.749) 113.001,80.362 ; 113.57,84.224 ccw(c114.391,85.045) v2@114.391,83.884
  Bottom Layer w0.5: v2(114.391,83.784) 114.459,83.852 C18.1@115.589,83.852
BOOT0: R3.2 U1.60 | length 7.6
  Top Layer w0.2: U1.60@85.88,86.266 85.88,89.817 v1(85.979,89.916) ; 85.88,89.315 cw(c86.58,89.315) v1@86.085,89.81
  Bottom Layer w0.2: R3.2@85.65,89.278 ccw(c85.196,89.916) v1(85.979,89.916) 85.979,89.182 R3.2@85.824,89.027 ; R3.2@85.766,89.115 ccw(c85.472,89.528) 85.979,89.528 ; v1@85.849,89.841 cw(c85.535,89.66) 85.885,89.566 cw(c86.235,89.473) v1@86.054,89.786 ; v1@85.873,89.81 cw(c85.617,89.554) 85.979,89.554 cw(c86.341,89.554) v1@86.085,89.81
BOOT1: R5.2 U1.28 | length 7.2
  Top Layer w0.2: v1@88.641,76.631 cw(c88.692,76.086) 89.079,76.473 ; v1(88.646,76.581) 88.971,76.581 ; v1@88.66,76.432 cw(c88.744,75.536) 89.38,76.172 ; v1@88.76,76.484 cw(c88.971,76.304) 88.971,76.581 ; v1@88.76,76.678 ccw(c88.971,76.858) 88.971,76.581 ; U1.28@89.38,74.516 89.38,76.172 ; 88.971,76.581 89.38,76.172
  Bottom Layer w0.2: v1(88.646,76.581) 88.745,76.482 R5.2@89.408,76.482 ; v1@88.752,76.687 ccw(c89.247,77.182) 89.247,76.482 ; v1@88.776,76.656 ccw(c89.257,76.934) 89.114,76.397 ; v1@88.796,76.482 cw(c88.796,75.567) R5.2@89.443,76.214 ; 89.066,76.482 ccw(c89.066,77.015) R5.2@89.443,76.638
CC1101_GD0: P3.2 U1.24 U2.6 | length 60.1
  Top Layer w0.2: v1@87.27,76.094 cw(c87.004,75.828) 87.38,75.828 ; U1.24@87.38,74.516 v1@87.38,76.196 ; 87.38,75.848 cw(c87.728,75.848) v1@87.482,76.094 ; v1(92.583,69.596) 93.345,69.596 99.676,75.927 99.676,85.527 101.079,86.931 v1(105.601,86.931) ; v1@92.689,69.49 cw(c92.945,69.234) 92.945,69.596 cw(c92.945,69.958) v1@92.689,69.702 ; P3.2@101.8,95.575 cw(c100.946,94.721) 102.153,94.721 cw(c103.361,94.721) P3.2@102.507,95.575 ; P3.2@101.941,95.716 cw(c101.429,95.204) 102.153,95.204 cw(c102.878,95.204) P3.2@102.366,95.716 ; P3.2@102.153,95.928 102.153,91.935 v1(103.641,90.447) ; v1@103.491,90.447 ccw(c103.129,90.447) 103.385,90.703 ccw(c103.641,90.959) v1@103.641,90.597 ; v1@105.495,86.825 ccw(c105.239,86.569) 105.239,86.931 ccw(c105.239,87.293) v1@105.495,87.037 ; v1@105.628,86.959 105.628,86.719 107.817,84.53 U2.6@108.481,84.53 ; v1@105.751,86.931 ccw(c106.559,86.931) 105.987,86.36
  Bottom Layer w0.2: v1@87.376,76.05 cw(c87.376,75.688) 87.632,75.944 cw(c87.888,76.2) v1@87.526,76.2 ; v1(87.376,76.2) 88.011,75.565 88.011,73.787 88.646,73.152 90.152,73.152 91.44,71.864 91.44,70.231 92.075,69.596 v1(92.583,69.596) ; v1@92.477,69.49 ccw(c92.221,69.234) 92.221,69.596 ccw(c92.221,69.958) v1@92.477,69.702 ; v1@103.641,90.297 cw(c103.641,89.935) 103.897,90.191 cw(c104.153,90.447) v1@103.791,90.447 ; v1(103.641,90.447) 105.601,88.487 v1(105.601,86.931) ; v1@105.495,87.037 ccw(c105.239,87.293) 105.601,87.293 ccw(c105.963,87.293) v1@105.707,87.037
CC1101_GD2: P3.4 U1.25 U2.3 | length 55.2
  Top Layer w0.2: U1.25@87.88,74.516 87.88,72.517 88.642,71.755 92.456,71.755 97.452,76.751 97.452,86.513 100.083,89.144 104.268,89.144 104.989,89.865 107.81,89.865 v1(109.041,91.096) 106.153,93.984 P3.4@106.153,95.928 ; P3.4@105.8,95.575 cw(c104.946,94.721) 106.153,94.721 cw(c107.361,94.721) P3.4@106.507,95.575 ; P3.4@105.941,95.716 cw(c105.429,95.204) 106.153,95.204 cw(c106.878,95.204) P3.4@106.366,95.716 ; v1@109.041,90.946 ccw(c109.041,90.584) 108.785,90.84 ccw(c108.529,91.096) 108.891,91.096 ccw(c108.529,91.096) 108.785,91.352 ccw(c109.041,91.608) v1@109.041,91.246 ; v1@109.994,88.175 cw(c109.994,87.813) 110.25,88.069 cw(c110.506,88.325) v1@110.144,88.325 ; v1(109.994,88.325) 110.581,87.737 U2.3@110.581,85.63
  Bottom Layer w0.2: v1@109.041,90.946 cw(c109.041,90.445) 109.396,90.799 ; v1@109.071,91.124 109.994,90.201 v1(109.994,88.325) ; v1@109.191,91.096 ccw(c109.414,91.096) 109.256,90.939 ; v1@109.888,88.431 ccw(c109.632,88.687) 109.994,88.687 ccw(c110.356,88.687) v1@110.1,88.431
CGND: C13.1 C14.1 C15.1 C16.1 C18.2 C19.2 C22.1 C23.1 C24.1 C25.1 C26.1 C27.2 C28.1 C29.1 CGND.1 P3.3 pad.2 R6.2 R7.1 U2.16 U2.19 U2.21 X2.2 X2.4 | length 181.9
  Top Layer w0.2: U2.21@110.581,83.53 111.581,82.53 U2.16@112.681,82.53 113.266,82.53 115.264,80.532 ; U2.21@110.981,82.98 ccw(c110.619,82.98) 110.875,83.236 ccw(c111.131,83.492) U2.21@111.131,83.13 ; U2.21@111.063,83.397 cw(c111.894,83.169) 111.894,84.03 ; U2.21@111.131,82.83 cw(c111.131,82.468) 111.387,82.724 cw(c111.644,82.98) U2.21@111.281,82.98 ; v1(111.131,84.08) 111.181,84.03 U2.19@112.681,84.03 ; U2.21@111.237,84.186 ccw(c111.614,84.563) U2.21@111.614,84.03 ; U2.21@111.256,83.344 cw(c112.156,83.096) 112.156,84.03 ; U2.21@111.359,84.308 ccw(c112.03,84.979) 112.03,84.03 ; U2.21@111.449,83.291 cw(c112.419,83.024) U2.19@112.419,84.03 ; U2.21@111.642,83.238 cw(c112.681,82.952) U2.19@112.681,84.03 ; 112.067,83.865 ccw(c111.975,84.207) U2.19@112.281,84.03 ; U2.16@113.081,82.53 cw(c113.081,82.084) 113.397,82.399 ; 114.452,81.344 cw(c113.216,80.108) C16.1@114.964,80.108 ; 114.794,81.002 cw(c113.899,80.108) C16.1@115.164,80.108 ; 115.135,80.661 cw(c114.582,80.108) C16.1@115.364,80.108 ; C16.1@115.165,80.39 ccw(c115.115,80.532) 115.264,80.532 ; C16.1@115.264,80.101 115.264,80.532 ; C16.1@115.364,80.39 cw(c115.414,80.532) 115.264,80.532
  Top Layer w0.35: CGND.1@101.181,65.223 102.058,66.1 v1(102.058,66.619) 106.739,66.619 C23.1@107.268,67.147 107.268,72.265 v1(106.009,73.524) C26.1@106.009,76.688 104.633,76.688 104.633,76.654 v1(104.643,76.644) ; CGND.1@101.181,65.448 ccw(c101.181,65.991) 101.565,65.607 ccw(c101.949,65.223) CGND.1@101.406,65.223 ; X2.2@101.452,81.303 cw(c101.036,80.742) v1@101.734,80.742 ; X2.2@101.734,81.685 v1@101.734,80.742 ; 101.795,80.97 ccw(c102.068,80.897) v1@101.824,80.755 ; v1@101.834,80.718 ccw(c102.708,80.718) C28.1@102.09,80.1 ; C28.1@101.947,80.242 ccw(c102.342,80.637) C28.1@102.342,80.079 ; C28.1@101.963,80.227 cw(c101.59,79.854) C28.1@102.117,79.854 ; X2.2@102.017,81.303 ccw(c102.433,80.742) v1@101.734,80.742 ; C28.1@102.342,79.847 101.759,80.431 v1(101.759,80.718) v1@101.734,80.742 ; P3.3@103.853,95.628 cw(c103.127,94.902) 104.153,94.902 cw(c105.18,94.902) P3.3@104.454,95.628 ; X2.4@103.934,84.105 104.313,84.484 C27.2@105.882,84.484 ccw(c105.882,82.31) X2.4@104.284,83.783 ; X2.4@104.026,84.02 cw(c105.084,83.046) v1@105.084,84.484 ; 104.153,91.863 ccw(c104.552,91.863) v1@104.27,91.582 ; P3.3@104.153,95.928 104.153,91.592 v1(104.217,91.528) ; X2.4@104.474,83.916 ccw(c103.939,84.679) v1@104.857,84.518 ; 104.631,84.363 ccw(c104.531,84.735) v1@104.866,84.542 ; v1@104.696,76.591 cw(c104.931,76.356) 104.931,76.688 ; v1@104.992,84.548 ccw(c105.317,84.775) 105.395,84.386 ; 105.348,84.341 ccw(c105.206,84.871) C27.2@105.681,84.597 ; 105.356,84.343 cw(c105.495,83.824) C27.2@105.763,84.289 ; C27.2@105.717,84.325 ccw(c105.333,83.941) 105.333,84.484 ccw(c105.333,85.027) C27.2@105.717,84.643 ; C26.1@105.844,76.529 ccw(c105.46,76.145) 105.46,76.688 ccw(c105.46,77.231) C26.1@105.844,76.847 ; C26.1@105.85,76.529 cw(c105.466,76.145) 106.009,76.145 cw(c106.553,76.145) C26.1@106.169,76.529 ; v1@106.599,87.563 cw(c106.497,87.183) C25.1@106.838,87.38 ; v1(106.619,87.636) C25.1@107.168,87.086 ; v1@106.691,87.655 ccw(c107.053,87.752) C25.1@106.865,87.428 ; C25.1@106.773,87.481 ccw(c107.168,87.876) C25.1@107.168,87.318 ; C25.1@106.789,87.466 cw(c106.416,87.093) C25.1@106.943,87.093 ; C23.1@106.873,66.752 cw(c107.268,66.357) C23.1@107.268,66.916 ; C23.1@106.888,66.768 ccw(c106.515,67.141) C23.1@107.043,67.141 ; C23.1@107.109,67.313 ccw(c106.725,67.697) 107.268,67.697 ccw(c107.811,67.697) C23.1@107.427,67.313 ; C22.1@107.122,70.537 cw(c106.77,70.185) 107.268,70.185 ; C22.1@107.122,70.868 ccw(c106.77,71.22) 107.268,71.22 ; 107.268,70.121 cw(c107.857,70.121) C22.1@107.44,70.537 ; 107.268,71.285 ccw(c107.857,71.285) C22.1@107.44,70.868 ; C19.2@112.932,78.45 114.378,78.45 115.264,79.337 C16.1@115.264,80.101 116.654,80.101 117.169,80.617 C14.1@117.169,83.784 118.124,83.784 v1(118.155,83.753) ; C19.2@113.092,78.291 cw(c113.476,77.907) 113.476,78.45 cw(c113.476,78.993) C19.2@113.092,78.609 ; C16.1@115.105,79.935 cw(c114.721,79.551) 115.264,79.551 cw(c115.808,79.551) C16.1@115.424,79.935 ; v1(115.34,91.928) 115.441,92.03 115.441,92.041 115.788,92.388 C29.1@115.788,93.64 ; C16.1@115.424,79.942 cw(c115.808,79.558) 115.808,80.101 cw(c115.808,80.644) C16.1@115.424,80.26 ; C29.1@115.629,93.475 cw(c115.245,93.091) 115.788,93.091 cw(c116.331,93.091) C29.1@115.947,93.475 ; R6.2@116.998,81.967 cw(c116.585,81.554) 117.169,81.554 ; R6.2@116.998,82.299 ccw(c116.585,82.712) 117.169,82.712 ; C14.1@117.01,83.618 cw(c116.626,83.234) 117.169,83.234 cw(c117.713,83.234) C14.1@117.329,83.618 ; 117.169,81.612 cw(c117.672,81.612) R6.2@117.317,81.967 ; 117.169,82.654 ccw(c117.672,82.654) R6.2@117.317,82.299 ; C14.1@117.329,83.625 cw(c117.713,83.241) 117.713,83.784 cw(c117.713,84.327) C14.1@117.329,83.943 ; 117.9,83.784 cw(c117.9,83.499) v1@118.102,83.7
  Bottom Layer w0.35: R7.1@98.552,67.564 101.041,67.564 102.058,66.547 v1(102.058,66.619) ; R7.1@98.711,67.405 cw(c99.095,67.021) 99.095,67.564 cw(c99.095,68.107) R7.1@98.711,67.723 ; v1(101.759,80.718) 101.759,80.461 v1@104.643,77.576 ; 101.808,66.797 ccw(c102.058,67.048) v1@102.058,66.694 ; v1@101.834,80.718 ccw(c102.636,80.718) 102.069,80.151 ; v1(104.217,91.528) 106.619,89.127 v1(106.619,87.636) ; v1(104.643,76.644) v1@104.643,77.576 ; v1@105.005,84.505 cw(c106.052,84.505) 105.312,85.245 ; v1@106.619,87.561 cw(c106.619,87.188) 106.882,87.452 ; v1@106.698,87.636 107.2,87.133 ; C15.1@106.9,79.833 cw(c107.295,79.438) C15.1@107.295,79.997 ; C15.1@106.9,80.623 ccw(c107.295,81.018) C15.1@107.295,80.46 ; C15.1@106.916,79.849 ccw(c106.543,80.222) C15.1@107.07,80.222 ; C15.1@106.916,80.608 cw(c106.543,80.235) C15.1@107.07,80.235 ; C13.1@108.39,84.943 ccw(c108.006,85.327) 108.549,85.327 ccw(c109.093,85.327) C13.1@108.709,84.943 ; C13.1@108.556,84.559 cw(c108.556,84.031) C13.1@108.929,84.405 ; C13.1@108.781,84.784 ccw(c109.34,84.784) C13.1@108.945,84.389 ; v1(110.031,82.98) v1(110.031,84.08) 109.253,84.08 C13.1@108.549,84.784 108.549,85.784 107.2,87.133 ; C24.1@112.724,87.34 114.639,87.34 ; C24.1@112.884,87.181 cw(c113.268,86.797) 113.268,87.34 cw(c113.268,87.883) C24.1@112.884,87.499 ; 114.639,87.496 ccw(c115.134,87.496) 114.784,87.146 ; 114.639,88.341 ccw(c115.979,88.341) v1@115.031,87.393 ; v1(115.34,91.928) 114.639,91.227 114.639,87.34 ; pad.2@116.255,60.529 ccw(c113.31,63.474) 117.475,63.474 ccw(c121.64,63.474) pad.2@118.695,60.529 ; pad.2@116.503,60.281 ccw(c114.155,62.629) 117.475,62.629 ccw(c120.795,62.629) pad.2@118.447,60.281 ; pad.2@116.75,60.034 ccw(c115,61.784) 117.475,61.784 ccw(c119.95,61.784) pad.2@118.2,60.034 ; C18.2@117.289,83.852 117.387,83.753 v1(118.155,83.753) ; C18.2@117.448,84.004 ccw(c118.054,84.61) v1@118.054,83.753 ; pad.2@117.475,59.309 117.475,83.074 v1(118.155,83.753) ; 117.736,84.582 cw(c116.908,83.753) v1@118.08,83.753 ; v1@104.643,77.576 C15.1@107.295,80.228 106.065,81.458 106.065,83.849 105.409,84.505 v1(104.93,84.505) 104.93,84.863 107.2,87.133 ; 114.639,87.34 v1(114.978,87.34) 118.155,84.164 v1(118.155,83.753)
  other v1: 106.841,58.072 103.779,58.39 101.352,58.419 113.689,58.448 105.455,58.997 100.052,59.141 103.114,59.95 101.384,60.063 106.928,60.066 113.631,60.355 104.79,60.47 102.334,61.164 100.516,61.492 105.021,61.741 106.697,61.741 116.549,61.799 118.629,61.828 113.631,62.262 115.451,62.666 103.149,62.864 100.852,63.004 117.474,62.984 106.812,63.677 104.998,63.733 102.016,63.851 117.156,64.111 115.682,64.313 118.745,64.371 113.718,64.573 103.513,64.937 106.841,65.266 117.011,65.411 104.53,65.584 105.801,65.613 113.775,66.162 100.404,66.377 118.976,66.653 103.354,66.687 115.971,66.74 117.705,67.289 105.71,67.736 104.308,67.83 113.718,68.444 102.335,68.49 117.011,68.473 115.596,68.56 107.218,69.162 118.803,69.34 103.206,69.447 105.469,69.518 113.66,70.207 117.734,70.496 102.452,70.57 115.451,70.842 116.52,70.871 104.539,71.255 99.539,71.325 118.167,72.027 116.607,72.142 113.862,72.2 100.504,72.342 106.841,72.39 105.224,72.904 118.947,73.298 101.364,73.325 117.271,73.471 115.682,73.529 107.136,73.606 103.89,73.693 118.167,73.818 113.92,73.905 104.697,74.957 107.183,74.97 115.624,75.061 117.098,75.118 113.891,75.407 118.282,75.87 103.75,76.08 107.347,76.343 113.978,76.765 116.896,76.996 115.653,77.083 104.768,77.536 117.994,78.036 102.838,78.343 116.405,78.788 118.947,79.365 100.943,79.642 117.878,79.828 105.399,80.765 118.769,81.501 111.131,82.98 118.84,84.66 103.504,85.414 102.03,85.449 107.581,86.108 116.137,86.256 116.106,87.471 115.102,89.169 115.26,90.538 106.084,90.608 107.382,91.134 113.014,91.538 106.066,91.819